# Allegro board Arduino-UNO - Copy.brd
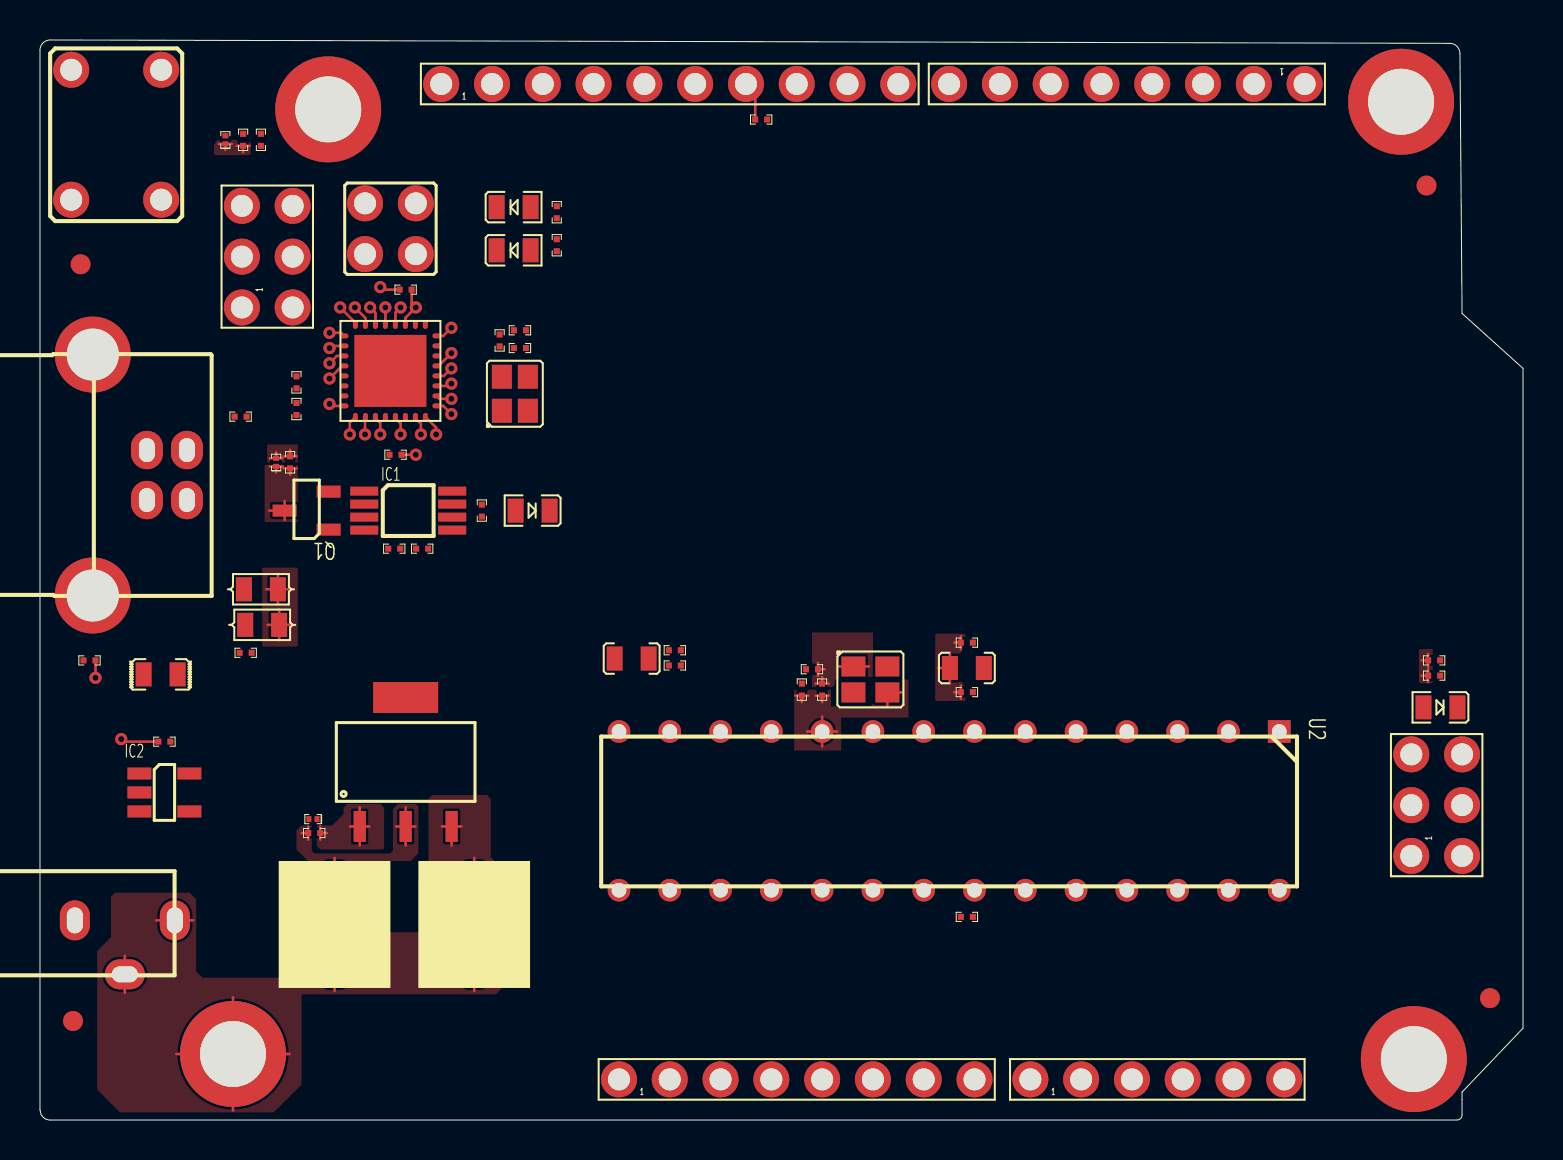
[diagram p0: board, top side]
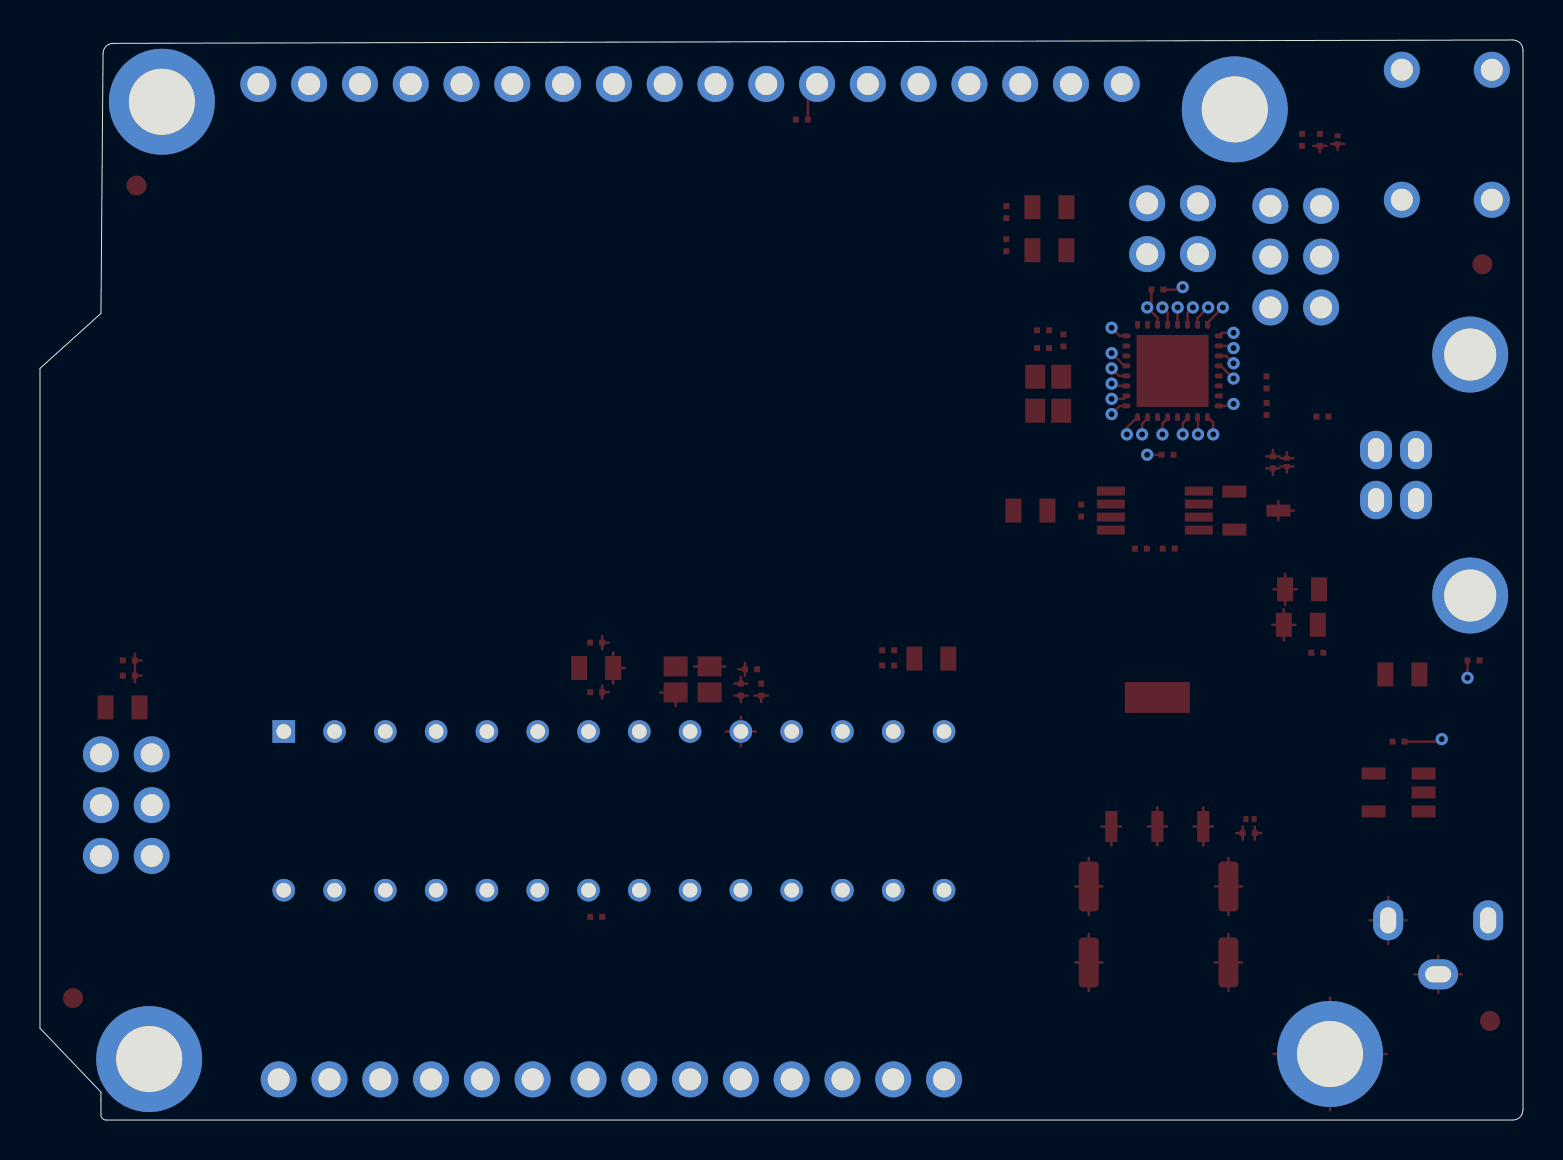
[diagram p1: board, bottom side, seen from below]

Outline 74.17 x 54.02 mm; copper layers: TOP, BOTTOM. Coordinates in mm from the lower left corner of the outline.
Outline path: 0,53.51 arc(0.15,53.87) 0.51,54.02 70.48,53.85 arc(70.86,53.71) 71.01,53.34 71.12,40.34 74.17,37.59 74.17,4.59 71.12,1.4 71.12,0.25 arc(71.05,0.07) 70.87,0 0.51,0 arc(0.24,0.07) 0.06,0.28 0,0.51 0,53.51

## Design rules (mm)
constraint set DEFAULT: min track width 0.127

## Placement (name value [footprint] x y rotation side)
C2  100n  [SMD0603]  36.07 50.04 180 top
C3  100n  [SMD0603]  24 39.5 0 top
C4  100n  [SMD0603]  22.99 38.99 270 top
C5  100n  [SMD0603]  38.1 21.53 270 top
C6  100n  [SMD0603]  31.75 22.73 0 top
C7  100n  [SMD0603]  11.05 49.02 90 top
C8  100n  [SMD0603]  31.75 23.49 0 top
C9  1u  [SMD0603]  18.29 41.53 180 top
C10  100n  [SMD0603]  38.61 22.54 0 top
C13  100n  [SMD0603]  2.48 22.99 180 top
C14  100n  [SMD0603]  46.35 10.16 180 top
C15  47u  [SOLID_CAP_5X5_4]  21.72 9.78 0 top
C16  47u  [SOLID_CAP_5X5_4]  14.73 9.78 0 top
C17  100n  [SMD0603]  13.72 14.35 0 top
C18  1u  [SMD0603]  6.22 18.92 180 top
C19  100n  [SMD0603]  46.35 23.88 0 top
C20  100n  [SMD0603]  46.35 21.4 0 top
CETCE16M0V53-R1  -  [16MHZ]  23.75 36.32 90 top
CETCE16M0V53-R2  -  [16MHZ]  41.53 22.03 0 top
D1  DIODE  [ESD_DIODE]  11.81 32.89 90 top
D2  RED  [LED_0805]  70.04 20.64 180 top
D3  DIODE  [ESD_DIODE]  9.27 49.02 90 top
D5  YELLOW  [LED_0805]  23.69 43.5 0 top
D6  DIODE  [ESD_DIODE]  13.65 15.05 180 top
D7  LED  [LED_0805]  24.64 30.48 180 top
D8  YELLOW  [LED_0805]  23.69 45.66 0 top
F1  MF-MSMF050-2 500mA  [FUSE_0805]  6.03 22.29 0 top
F2  fiducial  [FID2R00_1R00]  72.52 6.1 0 top
F3  fiducial  [FID2R00_1R00]  1.65 4.95 0 top
F4  fiducial  [FID2R00_1R00]  69.34 46.74 0 top
F5  fiducial  [FID2R00_1R00]  2.03 42.8 0 top
IC1  LMV358IDGKR  [SOP-8]  18.41 30.48 0 top
IC2  LP2985-33DBVR  [SOT-5]  6.22 16.38 0 top
J1  POWER  [HEADER1X8]  37.85 2.03 0 top
J2  ICSP1  [HEADER2X3]  11.37 43.18 90 top
J3  ICSP  [HEADER2X3]  69.85 15.75 90 top
J4  HEADER 10  [HEADER1X10]  31.5 51.82 0 top
J5  HEADER 4  [HEADER2X2]  17.53 44.58 180 top
J6  HEADER 8  [HEADER1X8]  54.36 51.82 180 top
J7  USB  [USB2_0_TYPE-B]  6.35 32.26 270 top
J8  HEADER 6  [HEADER1X6]  55.88 2.03 0 top
J9  DC-005C-2A-1.3  [12V-JACK]  1.14 8.64 0 top
L2  BEAD  [BEAD_0805]  29.59 23.08 0 top
L3  BEAD  [BEAD_0805]  46.35 22.61 180 top
Q1  FDN340P  [SOT-3]  13.34 30.48 180 top
R1  10K  [SMD0603]  12.51 32.89 90 top
R2  1K  [SMD0603]  69.72 22.22 0 top
R3  1K  [SMD0603]  69.72 22.99 0 top
R4  10K  [SMD0603]  10.16 49.02 90 top
R5  1M  [SMD0603]  24 38.61 180 top
R7  1M  [SMD0603]  39.12 21.53 90 top
R8  1K  [SMD0603]  17.78 33.27 0 top
R9  1K  [SMD0603]  25.84 45.4 270 top
R10  22R  [SMD0603]  10.29 23.37 0 top
R11  22R  [SMD0603]  10.03 35.18 0 top
R12  1K  [SMD0603]  25.84 43.75 90 top
R13  1K  [SMD0603]  12.83 35.56 90 top
R14  1K  [SMD0603]  12.83 36.89 90 top
R15  10K  [SMD0603]  17.72 28.57 0 top
R16  1K  [SMD0603]  22.1 30.48 90 top
R17  10K  [SMD0603]  19.11 28.57 0 top
RV1  VARISTOR  [VAR_0805]  11.05 26.54 0 top
RV2  VARISTOR  [VAR_0805]  11.11 24.77 0 top
SW1  SW DPST  [SW]  3.81 49.28 90 top
T1  mounthing hole  [MTH]  9.65 3.3 0 top
T2  mounthing hole  [MTH]  68.71 3.05 0 top
T3  mounthing hole  [MTH]  68.07 50.93 0 top
T4  mounthing hole  [MTH]  14.41 50.55 0 top
U1  ATMEGA16U2-MUR  [QFN33]  17.53 37.47 0 top
U2  ATMEGA328P-PU  [DIP28]  61.98 19.43 270 top
U3  NCP1117ST50T3G  [SOT-23]  18.29 17.91 0 top

## Library data of the parts
C2-C10 C13 C14 C17-C20 = CAP NP
C15 C16 = CAP
CETCE16M0V53-R1 CETCE16M0V53-R2 = CRYSTAL_2
D1 D3 D6 = DIODE
D2 D5 D7 D8 = LED
F1 = FUSE
F2-F5 = fiducial
IC1 = LMV358IDGKR
IC2 = LP2985-33DBVR_1
J1 J6 = HEADER 8
J2 J3 = HEADER 6_0
J4 = HEADER 10
J5 = HEADER 4_1
J7 = HEADER 4_2
J8 = HEADER 6
J9 = DC-005C-2A-1.3
L2 L3 = BEAD
Q1 = FDN340P_0
R1-R5 R7-R17 = RESISTOR
RV1 RV2 = VARISTOR
SW1 = SW DPST
T1-T4 = mounthing hole
U1 = ATMEGA16U2-MUR_5
U2 = ATMEGA328P-PU_5
U3 = NCP1117ST50T3G_0

## Footprints (pads in the part's own frame, mm; a bottom-side part is the same pattern mirrored in y, then rotated)
12V-JACK
  oval 1.5x2 hole 0.8x1.3: 1(5.6,1.35) 2(0.6,1.35)
  oval 2x1.5 hole 1.3x0.8: 3(3.1,-1.35)
16MHZ
  rect 1.2x1 smd: 1(-0.85,0.65) 2(0.85,0.65) 3(0.85,-0.65) 4(-0.85,-0.65)
BEAD_0805
  rect 0.8x1.2 smd: 1(-0.85,0) 2(0.85,0)
DIP28
  rect 1.133x1.133 hole 0.733: 1(0,0)
  round 1.133 hole 0.733: 2(0,-2.54) 3(0,-5.08) 4(0,-7.62) 5(0,-10.16) 6(0,-12.7) 7(0,-15.24) 8(0,-17.78) 9(0,-20.32) 10(0,-22.86) 11(0,-25.4) 12(0,-27.94) 13(0,-30.48) 14(0,-33.02) 15(7.938,-33.02) 16(7.938,-30.48) 17(7.938,-27.94) 18(7.938,-25.4) 19(7.938,-22.86) 20(7.938,-20.32) 21(7.938,-17.78) 22(7.938,-15.24) 23(7.938,-12.7) 24(7.938,-10.16) 25(7.938,-7.62) 26(7.938,-5.08) 27(7.938,-2.54) 28(7.938,0)
ESD_DIODE
  rect 0.25x0.3 smd: 1(-0.203,0) 2(0.203,0)
FID2R00_1R00
  round 1 smd: 1(0,0)
FUSE_0805
  rect 0.8x1.2 smd: 1(-0.85,0) 2(0.85,0)
HEADER1X6
  round 1.8 hole 1.1: 1(-6.35,0) 2(-3.81,0) 3(-1.27,0) 4(1.27,0) 5(3.81,0) 6(6.35,0)
HEADER1X8
  round 1.8 hole 1.1: 1(-8.89,0) 2(-6.35,0) 3(-3.81,0) 4(-1.27,0) 5(1.27,0) 6(3.81,0) 7(6.35,0) 8(8.89,0)
HEADER1X10
  round 1.8 hole 1.1: 1(-11.43,0) 2(-8.89,0) 3(-6.35,0) 4(-3.81,0) 5(-1.27,0) 6(1.27,0) 7(3.81,0) 8(6.35,0) 9(8.89,0) 10(11.43,0)
HEADER2X2
  round 1.8 hole 1.1: 1(-1.27,1.27) 2(1.27,1.27) 3(-1.27,-1.27) 4(1.27,-1.27)
HEADER2X3
  round 1.8 hole 1.1: 1(-2.54,1.27) 2(0,1.27) 3(2.54,1.27) 4(-2.54,-1.27) 5(0,-1.27) 6(2.54,-1.27)
LED_0805
  rect 0.8x1.2 smd: 1(-0.85,0) 2(0.85,0)
MTH
  round 5.3 hole 3.3 unplated: (0,0)
QFN33
  custom 0.4x0.25 smd: 1(-2.3,1.75) 2(-2.3,1.25) 3(-2.3,0.75) 4(-2.3,0.25) 5(-2.3,-0.25) 6(-2.3,-0.75) 7(-2.3,-1.25) 8(-2.3,-1.75) 17(2.3,-1.75) 18(2.3,-1.25) 19(2.3,-0.75) 20(2.3,-0.25) 21(2.3,0.25) 22(2.3,0.75) 23(2.3,1.25) 24(2.3,1.75)
  custom 0.25x0.4 smd: 9(-1.75,-2.3) 10(-1.25,-2.3) 11(-0.75,-2.3) 12(-0.25,-2.3) 13(0.25,-2.3) 14(0.75,-2.3) 15(1.25,-2.3) 16(1.75,-2.3) 25(1.75,2.3) 26(1.25,2.3) 27(0.75,2.3) 28(0.25,2.3) 29(-0.25,2.3) 30(-0.75,2.3) 31(-1.25,2.3) 32(-1.75,2.3)
  rect 3.6x3.6 smd: 33(0,0)
SMD0603
  rect 0.3x0.3 smd: 1(-0.3,0) 2(0.3,0)
SOLID_CAP_5X5_4
  rrect 1x2.5 smd: 1(0,1.9) 2(0,-1.9)
SOP-8
  rect 1.4x0.45 smd: 1(-2.2,0.975) 2(-2.2,0.325) 3(-2.2,-0.325) 4(-2.2,-0.975) 5(2.2,-0.975) 6(2.2,-0.325) 7(2.2,0.325) 8(2.2,0.975)
SOT-3
  rect 1.2x0.6 smd: 1(-1.1,0.95) 2(-1.1,-0.95) 3(1.1,0)
SOT-5
  rect 1.2x0.6 smd: 1(-1.25,0.95) 2(-1.25,0) 3(-1.25,-0.95) 4(1.25,-0.95) 5(1.25,0.95)
SOT-23
  rect 0.61x1.549 smd: 1(-2.299,-3.226) 2(0,-3.226) 3(2.299,-3.226)
SW
  round 1.8 hole 1.1: 1(-3.25,2.25) 2(3.25,2.25) 3(-3.25,-2.25) 4(3.25,-2.25)
USB2_0_TYPE-B
  oval 1.92x1.6 hole 1.2x0.8: 1(1.25,1) 2(-1.25,1) 3(-1.25,-1) 4(1.25,-1)
  round 3.8 hole 2.6: 5(-6.025,-3.71) 6(6.025,-3.71)
VAR_0805
  rect 0.8x1.2 smd: 1(-0.85,0) 2(0.85,0)

## Nets
+3V3: IC1.2 J1.3
+5V: C16.1 C17.1 D1.1(K) D3.1(K) IC2.1 IC2.3 J1.2 J1.5 J2.2 J3.2 L2.1 L3.1 Q1.3 R1.1 R2.1 R3.1 R4.1 R9.2 R12.2 U3.2(OUTPUT)
GND: C2.2 C3.1 C4.1 C5.1 C6.2 C8.2 C9.2 C10.1 C13.1 C14.2 C15.2 C16.2 C17.2 C18.2 C19.2 C20.2 D2.1(CATHODE) D7.1(CATHODE) IC1.4 IC2.2 J1.6 J1.7 J2.6 J3.6 J4.7 J9.1 J9.3 R8.2 R17.2 RV1.2 RV2.2 SW1.3 SW1.4(NO2) U1.3 U1.28 U1.33 U3.1
VIN: J1.8 R15.1
AD0: J8.1 U2.23
AD1: J8.2 U2.24
AD2: J8.3 U2.25
AD3: J8.4 U2.26
AD4/SDA: J4.9 J8.5 U2.27
AD5/SCL: J4.10 J8.6 U2.28
AREF: C2.1 J4.8 U2.21
CMP: IC1.3 R15.2 R17.1
GATE_CMD: IC1.1 Q1.1
IO0: J6.1 R13.2 U2.2
IO1: J6.2 R14.2 U2.3
IO2: J6.3 U2.4
IO3: J6.4 U2.5
IO4: J6.5 U2.6
IO5: J6.6 U2.11
IO6: J6.7 U2.12
IO7: J6.8 U2.13
IO8: J4.1 U2.14
IO9: J4.2 U2.15
M8RXD: R13.1 U1.9
M8TXD: R14.1 U1.8
MISO: J3.1 J4.5 U2.18
MISO1: J2.1 U1.17
MOSI: J3.4 J4.4 U2.17
MOSI1: J2.4 U1.16
PB4: J5.1 U1.18
PB5: J5.3 U1.19
PB6: J5.2 U1.20
PB7: J5.4 U1.21
PWRIN: D6.2 J9.2
RESET: C7.2 D3.2 J1.4 J3.5 R4.2 SW1.1 SW1.2 U2.1
RESET1: D1.2 J2.5 R1.2 U1.24
RXLED: D5.1(CATHODE) U1.10
SCK: IC1.5 J3.3 J4.6 U2.19
SCK1: J2.3 U1.15
SS: J4.3 U2.16
TXLED: D8.1(CATHODE) U1.11
USBVCC: F1.2 Q1.2(S) U1.31
N02541: C5.2 CETCE16M0V53-R2.3 R7.1 U2.10
N02568: C10.2 CETCE16M0V53-R2.1 R7.2 U2.9
N04323: D2.2 R2.2 R3.2
N06576: C3.2 CETCE16M0V53-R1.3 R5.1 U1.2
N06640: C4.2 CETCE16M0V53-R1.1 R5.2 U1.1(XTAL1)
N09504: C7.1 R8.1 U1.13
N10186: D5.2 R12.1
N10188: D8.2 R9.1
N15357: C6.1 C8.1 L2.2 U1.4 U1.32
N15720: C9.1 U1.27
N16909: C14.1 U2.8 U2.22
N17127: J7.2 R10.1 RV1.1
N17131: J7.3 R11.1 RV2.1
N17135: R10.2 U1.30
N17147: R11.2 U1.29
N17571: F1.1 J7.1(VCC)
N17575: C13.2 J7.4 J7.5 J7.6
N25653: IC1.6 IC1.7 R16.1
N27375: C15.1 D6.1(K) U3.3
N62613: C19.1 C20.1 L3.2 U2.7(VCC) U2.20
N244544: C18.1 IC2.5(VOUT)
N255471: D7.2 R16.2

Pads without a net: CETCE16M0V53-R1 2 4; CETCE16M0V53-R2 2 4; F2 1; F3 1; F4 1; F5 1; IC1 8; IC2 4; J1 1; U1 5 6 7 12 14 22 23 25 26

## Via types
v1: diameter 0.61, hole 0.305, TOP to BOTTOM, 27 vias

## Routing (per net, layer and track width the routed paths; a pad name or vN(x,y) marks a point on that pad's centre or on a via; arc(x,y) is an arc through that point)
+5V: length 15.7
  TOP w0.127: 18.29,13.73 U3.2 ; U3.2 18.29,15.63 ; U3.2 17.81,14.68 ; U3.2 18.77,14.68 ; 11.46,30.48 Q1.3 ; Q1.3 12.24,30 ; Q1.3 12.24,30.96 ; R4.1 10.49,48.72 ; R4.1 10.16,48.39 ; R4.1 9.83,48.72 ; C16.1 14.73,13.11 ; C16.1 15.41,11.68 ; C16.1 14.73,10.25 ; C16.1 14.05,11.68 ; D1.1 12.14,32.69 ; D1.1 11.81,32.39 ; D1.1 11.48,32.69 ; 69.42,22.66 R3.1 ; R3.1 69.42,23.31 ; R3.1 69.1,22.99 ; 12.18,32.59 R1.1 ; R1.1 12.84,32.59 ; R1.1 12.51,32.27 ; 9.27,48.52 D3.1 ; D3.1 8.94,48.82 ; D3.1 9.6,48.82 ; 13.09,14.35 C17.1 ; C17.1 13.42,14.02 ; C17.1 13.42,14.68 ; 69.1,22.22 R2.1 ; R2.1 69.42,21.9 ; R2.1 69.42,22.55
GND: length 45.8
  TOP w0.127: U1.3 14.85,38.22 v1(14.48,37.85) ; 14.73,6.45 C16.2 ; C16.2 14.73,9.31 ; C16.2 15.41,7.88 ; C16.2 14.05,7.88 ; 9.65,3.3 9.65,6.13 ; 9.65,3.3 12.48,3.3 ; 9.65,3.3 6.82,3.3 ; 9.65,3.3 9.65,0.47 ; C17.2 14.34,14.35 ; C17.2 14.02,14.68 ; C17.2 14.02,14.02 ; C2.2 35.77,51.35 J4.7 ; U3.1 16.47,14.68 ; U3.1 15.99,13.73 ; U3.1 15.51,14.68 ; U3.1 15.99,15.63 ; v1(4.06,19.05) 4.19,18.92 C18.2 ; 4.24,6.36 J9.3 ; J9.3 4.24,8.21 ; J9.3 3.07,7.29 ; J9.3 5.42,7.29 ; C13.1 v1(2.78,22.12) ; 11.32,26.54 RV1.2 ; RV1.2 11.9,25.77 ; RV1.2 11.9,27.32 ; RV1.2 12.48,26.54 ; C15.2 22.39,7.88 ; C15.2 21.72,6.45 ; C15.2 21.72,9.31 ; C15.2 21.04,7.88 ; 6.74,8.81 J9.1 ; J9.1 5.82,9.99 ; J9.1 7.67,9.99 ; J9.1 6.74,11.16 ; R8.2 v1(18.8,33.27) ; RV2.2 11.96,25.54 ; RV2.2 12.54,24.77 ; RV2.2 11.38,24.77 ; RV2.2 11.96,23.99 ; v1(17.02,41.66) 17.14,41.53 C9.2 ; U1.28 17.78,40.38 v1(18.03,40.64)
M8RXD: length 1
  TOP w0.127: U1.9 15.49,34.88 v1(15.49,34.29)
M8TXD: length 0.8
  TOP w0.127: v1(14.48,35.81) 14.58,35.71 U1.8
MISO1: length 0.9
  TOP w0.127: v1(20.57,35.31) 20.17,35.71 U1.17
MOSI1: length 1.1
  TOP w0.127: U1.16 19.81,34.63 v1(19.81,34.29)
PB4: length 0.8
  TOP w0.127: v1(20.57,36.07) 19.97,36.07 U1.18
PB5: length 0.8
  TOP w0.127: U1.19 20.46,36.71 v1(20.57,36.83)
PB6: length 0.9
  TOP w0.127: U1.20 20.2,37.21 v1(20.57,37.59)
PB7: length 1
  TOP w0.127: U1.21 19.94,37.72 v1(20.57,38.35)
RESET1: length 2.9
  TOP w0.127: U1.24 20.17,39.22 v1(20.57,39.62) ; 11.48,33.1 D1.2 ; D1.2 11.81,33.4 ; D1.2 12.14,33.1 ; 12.18,33.19 R1.2 ; R1.2 12.84,33.19 ; R1.2 12.51,33.52
RXLED: length 0.9
  TOP w0.127: v1(16.26,34.29) 16.26,35.15 U1.10
SCK1: length 1
  TOP w0.127: v1(19.05,34.29) 19.05,34.82 18.78,35.09 U1.15
TXLED: length 1
  TOP w0.127: v1(17.02,34.29) 17.02,34.85 16.78,35.09 U1.11
USBVCC: length 1.1
  TOP w0.127: v1(15.75,40.64) 16.28,40.11 U1.31
N02541: length 6.4
  TOP w0.127: R7.1 39.44,21.23 ; R7.1 38.79,21.23 ; R7.1 39.12,20.9 ; 38.37,19.43 U2.10 ; U2.10 39.12,20.18 ; U2.10 39.12,18.69 ; U2.10 39.86,19.43 ; 37.77,21.23 C5.2 ; C5.2 38.43,21.23 ; C5.2 38.1,20.9 ; 42.38,20.71 CETCE16M0V53-R2.3 43.16,21.38
N02568: length 3.5
  TOP w0.127: C10.2 39.24,22.54 ; C10.2 38.91,22.21 ; C10.2 38.91,22.87 ; 41.46,22.68 CETCE16M0V53-R2.1 39.9,22.68 ; 38.79,21.83 R7.2 ; R7.2 39.12,22.15 ; R7.2 39.44,21.83
N06576: length 0.8
  TOP w0.127: U1.2 14.59,38.72 v1(14.48,38.61)
N06640: length 0.8
  TOP w0.127: U1.1 15.07,39.37 v1(14.48,39.37)
N09504: length 1
  TOP w0.127: v1(18.03,34.29) 18.03,34.83 17.78,35.09 U1.13
N15357: length 2.2
  TOP w0.127: v1(14.48,37.08) 15.11,37.72 U1.4 ; U1.32 15.78,39.88 v1(15.01,40.64)
N15720: length 2.1
  TOP w0.127: C9.1 18.59,40.85 v1(18.8,40.64) 18.28,40.12 U1.27
N17135: length 1
  TOP w0.127: U1.30 16.78,40.37 v1(16.51,40.64)
N17147: length 0.9
  TOP w0.127: v1(17.27,40.64) 17.28,40.64 U1.29
N27375: length 6.1
  TOP w0.127: 21.72,10.25 C15.1 ; C15.1 22.39,11.68 ; C15.1 21.04,11.68 ; C15.1 21.72,13.11 ; 20.59,13.73 U3.3 ; U3.3 20.1,14.68 ; U3.3 21.07,14.68
N62613: length 4.1
  TOP w0.127: 44.93,22.61 L3.2 ; L3.2 45.5,21.83 ; L3.2 45.5,23.38 ; 46.06,21.07 C20.1 ; C20.1 45.73,21.4 ; C20.1 46.06,21.73 ; 45.73,23.88 C19.1 ; C19.1 46.06,23.55 ; C19.1 46.06,24.2

## Copper pours and planes (outline as drawn; the poured copper is in the pictures)
+5V on TOP: 68.96,23.49 68.96,21.91 69.02,21.84 69.66,21.84 69.66,23.56 69.02,23.56
+5V on TOP: 12.89,32.77 12.89,29.91 11.24,29.91 11.24,32.77
+5V on TOP: 8.76,48.83 8.76,48.9 8.89,49.02 10.41,49.02 10.54,48.9 10.54,48.32 10.48,48.26 8.76,48.26 8.7,48.32 8.7,48.77
+5V on TOP: 13.59,13.46 13.59,14.73 13.08,14.73 12.83,14.48 12.83,13.53 13.53,12.83 13.78,12.83 13.78,10.22 13.9,10.1 14.1,10.1 15.62,10.1 15.75,10.22 15.75,12.89 15.81,12.95 18.54,12.95 18.92,13.34 18.92,15.68 18.8,15.81 17.91,15.81 17.65,15.56 17.65,13.46 17.53,13.34 13.72,13.34
GND on TOP: 11.11,27.62 11.11,23.69 12.89,23.69 12.89,27.62
GND on TOP: 13.84,14.73 13.84,13.72 14.03,13.53 17.14,13.53 17.21,13.59 17.21,15.62 17.02,15.81 15.37,15.81 15.18,15.62 15.18,15.3 14.61,14.73
GND on TOP: 3.56,9.14 2.86,8.45 2.86,1.52 4,0.38 11.68,0.38 13.08,1.78 13.08,6.22 13.14,6.29 22.8,6.29 23.24,6.73 23.24,8.95 22.8,9.4 12.57,9.4 12.06,8.89 12.06,7.11 8.13,7.11 7.81,7.43 7.81,11.05 7.49,11.37 3.75,11.37 3.56,11.18
Net_82 on TOP (solid shape): 19.91,20.36 16.66,20.36 16.66,21.91 19.91,21.91
RESET1 on TOP: 11.37,32.89 12.89,32.89 12.89,33.78 11.37,33.78
N02541 on TOP: 37.72,21.53 39.56,21.53 39.56,20.7 41.53,20.7 41.59,20.76 41.59,22.03 43.43,22.03 43.43,20.13 40.07,20.13 40.07,18.48 37.72,18.48
N02568 on TOP: 38.61,24.38 38.61,21.65 38.67,21.59 39.56,21.59 39.75,21.78 39.75,22.03 41.66,22.03 41.66,24.38
N27375 on TOP: 19.43,16.07 19.43,12.76 20.45,11.75 20.45,9.97 20.76,9.65 23.24,9.65 23.81,10.22 23.81,11.87 22.54,13.14 22.54,16.07 22.35,16.26 19.62,16.26
N62613 on TOP: 44.83,24.32 46.23,24.32 46.29,24.26 46.29,23.62 46.04,23.37 46.04,21.97 46.29,21.72 46.29,21.02 46.23,20.95 44.83,20.95 44.77,21.02 44.77,24.26
